# Altium PCB ESE516_shipwars_PCB.PcbDoc (part 1 of 2)
Units mil, origin at the board's own origin, x right, y up, seen from the top; angles counter-clockwise.
Board outline 2999 x 2670.2 mil, 4 copper layers (Top Layer, GroundPlane, PowerPlane, Bottom Layer), stack 58.4 mil thick; 119 components, 72 nets, 383 pads, 75 vias.
Unrouted connection lines stored in the file: 92.
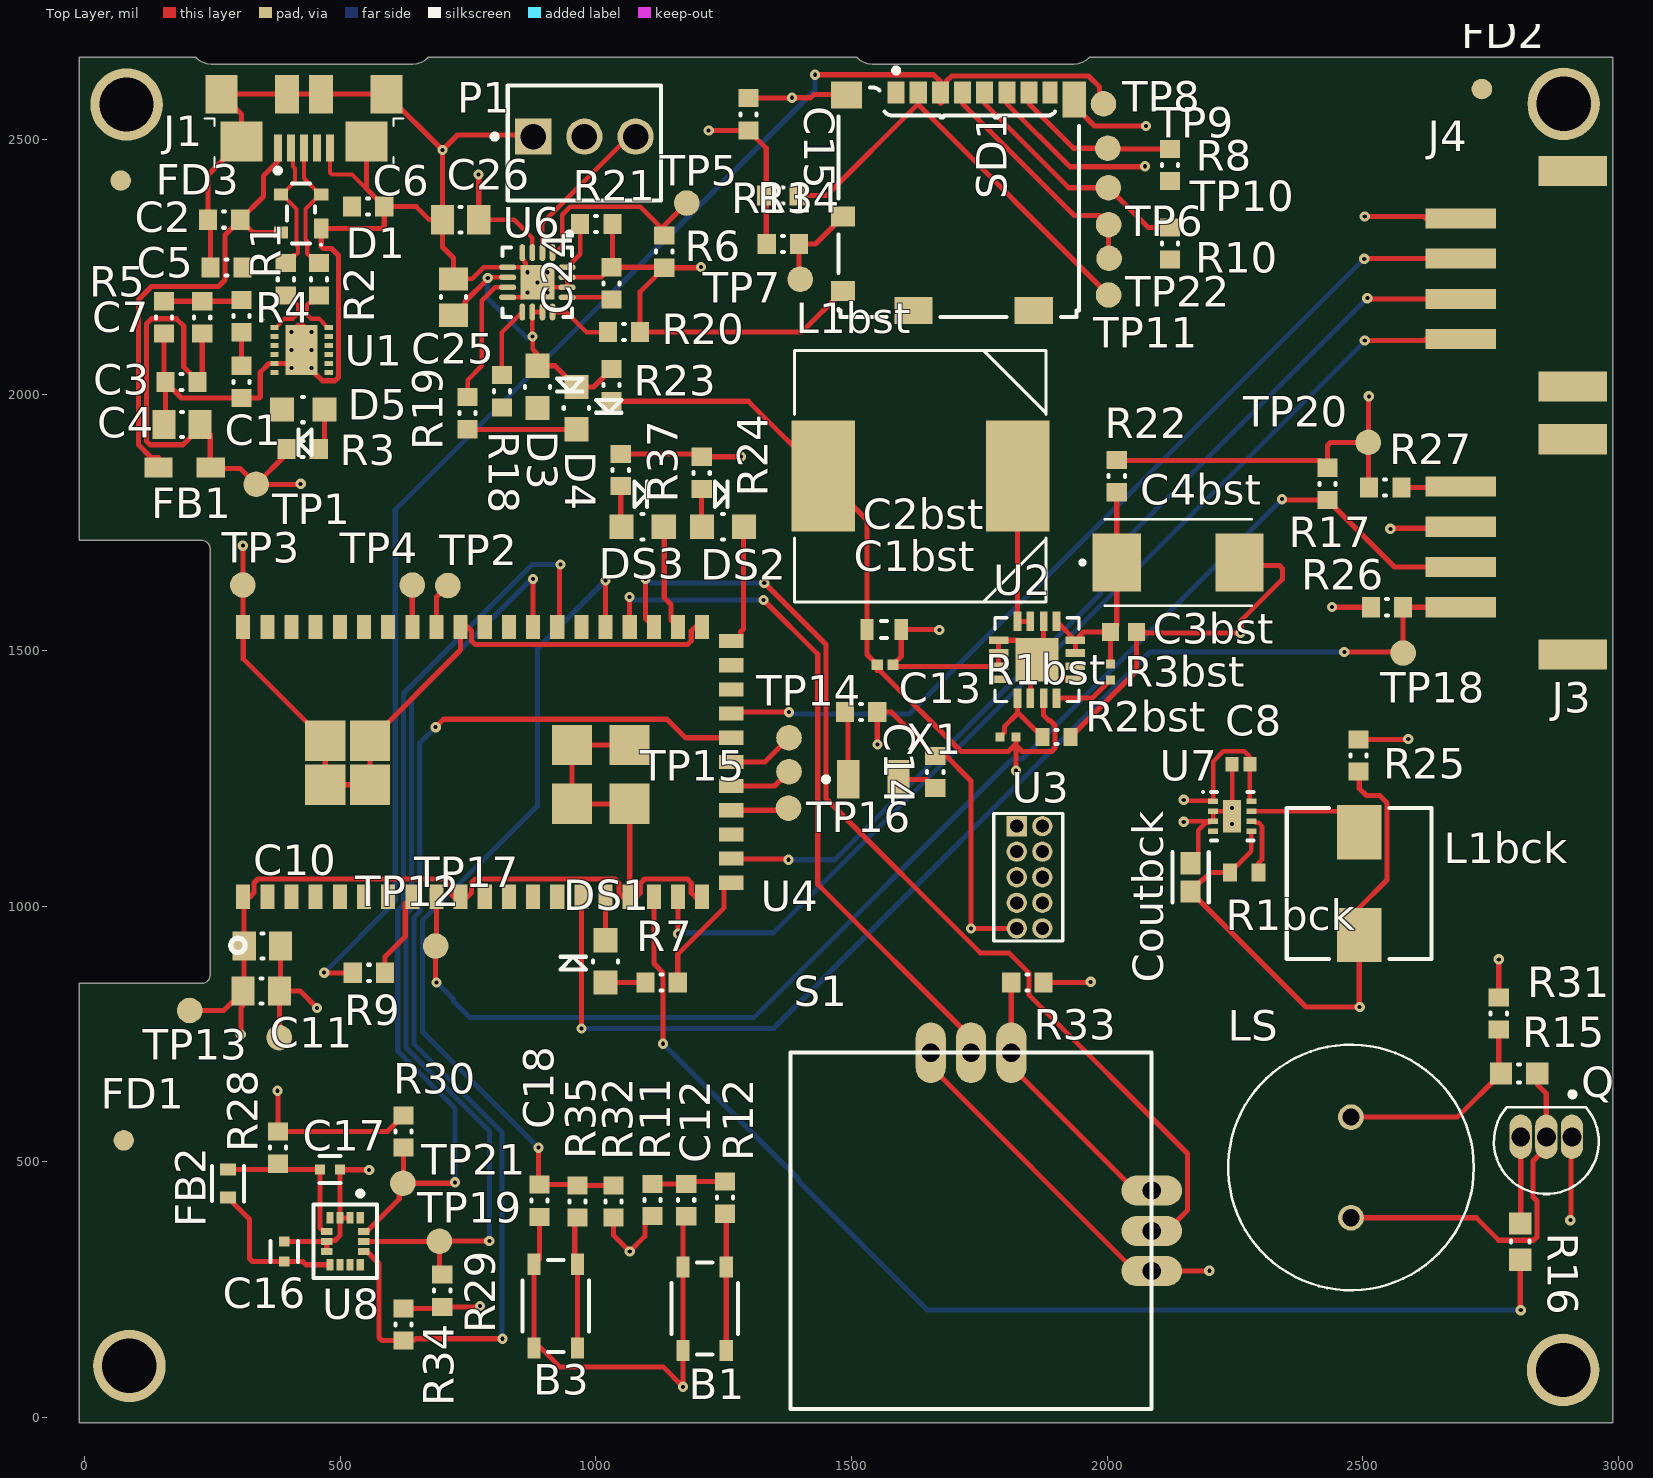
[diagram p0: Top Layer view]
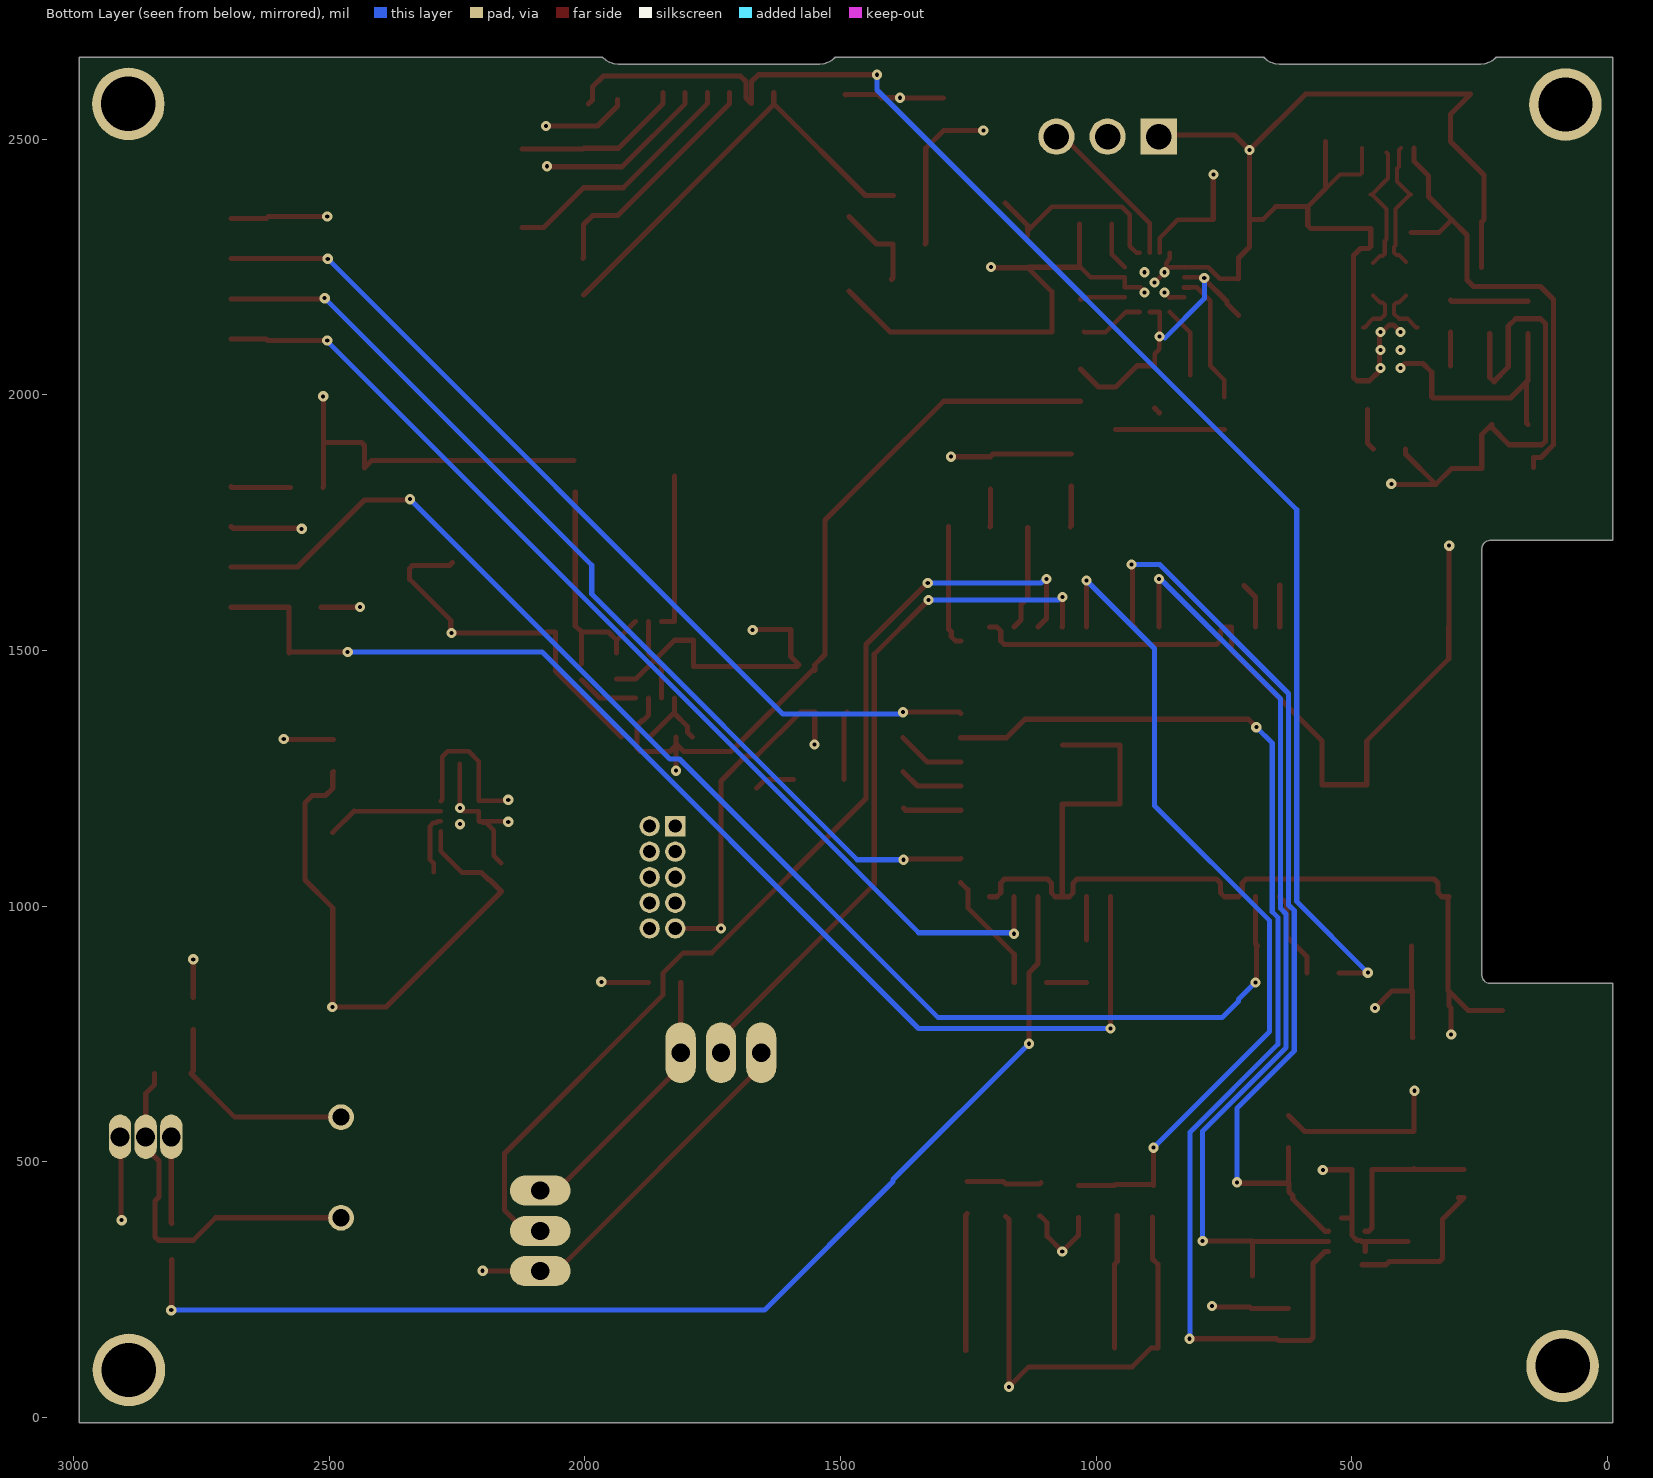
[diagram p1: Bottom Layer view, seen from below]

## Layer stack, top to bottom
Top Solder: solder mask 1, Solder Resist, Dk 3.5
Top Layer: signal copper 1.5
Dielectric1: prepreg 13, PP-006, Dk 4.1
GroundPlane: signal copper 0.7
Dielectric 2: core 28, Core-009, Dk 4.5
PowerPlane: signal copper 0.7
Dielectric 3: prepreg 13, PP-006, Dk 4.1
Bottom Layer: signal copper 1.5
Bottom Solder: solder mask 1, Solder Resist, Dk 3.5

## Board outline
-10,-10 -10,849.18 230.16,849.18 233.66,849.57 236.99,850.73 239.98,852.61 242.48,855.1 244.35,858.09 245.51,861.42 245.91,864.93 245.91,1699.57 245.51,1703.08 244.35,1706.41 242.48,1709.4 239.98,1711.89 236.99,1713.77 233.66,1714.93 230.16,1715.32 -10,1715.32 -10,2660.2 217.99,2660.16 224.34,2654.35 231.77,2650.01 239.95,2647.33 248.5,2646.42 642.2,2646.42 650.77,2647.32 658.95,2650.01 666.38,2654.37 672.72,2660.2 1510.67,2660.16 1517.02,2654.35 1524.45,2650.01 1532.62,2647.33 1541.18,2646.42 1934.88,2646.42 1943.45,2647.32 1951.63,2650.01 1959.06,2654.37 1965.39,2660.2 2989,2660.2 2989,-10

## Design rules (kind name [scope] priority, off if disabled: settings)
AcuteAngle [All] p1: minimum=6.00000000000000E+0001 checktracksonly=TRUE
AssemblyTestPointUsage [All] p1 off: allowmultiple=TRUE
AssemblyTestpoint [All] p1 off: testpointundercomponent=TRUE minsize=30 maxsize=100 preferedsize=60 minholesize=0 maxholesize=40 preferedholesize=32 testpointgrid=1 usegrid=FALSE gridtolerance=0.01 allowsidebottom=TRUE
BoardOutlineClearance "BoardOutlineClearance_Inner Layer" [OnLayer('GroundPlane')OR OnLayer('PowerPlane')] p1: gap=20 ignorepadtopadclearanceinfootprint=FALSE
BoardOutlineClearance BoardOutlineClearance_OuterLayers [All] p2: gap=10 ignorepadtopadclearanceinfootprint=FALSE except(20: SMDPad-OutlineEdge SMDPad-CavityEdge SMDPad-CutoutEdge THPad-OutlineEdge THPad-CavityEdge THPad-CutoutEdge)
Clearance [All] p1: gap=6 ignorepadtopadclearanceinfootprint=FALSE except(10: SMDPad-THPad)
DiffPairsRouting [All] p1: maxlimit=10 minlimit=6 mostfreqgap=10 toplayer_minwidth=6 toplayer_maxwidth=25 toplayer_prefwidth=15 midlayer1_minwidth=6 midlayer1_maxwidth=25 midlayer1_prefwidth=15 midlayer2_minwidth=6 midlayer2_maxwidth=25 midlayer2_prefwidth=15 bottomlayer_minwidth=6 bottomlayer_maxwidth=25 bottomlayer_prefwidth=15 maxuncoupledlength=500
FabricationTestPointUsage [All] p1 off: valid=0 allowmultiple=TRUE
FabricationTestpoint [All] p1 off: side=2 testpointundercomponent=TRUE minsize=30 maxsize=100 preferedsize=60 minholesize=0 maxholesize=40 preferedholesize=32 testpointgrid=1 allowsidebottom=TRUE usegrid=FALSE gridtolerance=0.01
HoleSize [All] p1: absolutevalues=TRUE maxlimit=150 minlimit=8 maxpercent=80.000 minpercent=20.000
MinimumAnnularRing [All] p1: minimumring=6
MinimumSolderMaskSliver [All] p1: minsoldermaskwidth=2
PlaneClearance [All] p1: clearance=10
PlaneConnect [All] p1: pad.planeconnectstyle=Relief pad.reliefexpansion=20 pad.reliefentries=4 pad.reliefconductorwidth=10 pad.reliefairgap=10 via.planeconnectstyle=Direct via.reliefexpansion=20 via.reliefentries=4 via.reliefconductorwidth=10 via.reliefairgap=10
PolygonConnect [All] p1: thpad.connectstyle=Relief thpad.reliefconductorwidth=10 thpad.reliefentries=4 thpad.polygonreliefangle="90 Angle" thpad.airgapwidth=8 smdpad.connectstyle=Relief smdpad.reliefconductorwidth=10 smdpad.reliefentries=4 smdpad.polygonreliefangle="90 Angle" smdpad.airgapwidth=8 via.connectstyle=Direct via.reliefconductorwidth=10 via.reliefentries=4 via.polygonreliefangle="90 Angle" via.airgapwidth=8
RoutingVias [All] p1: holewidth=8 width=20 viastyle="Through Hole" minholewidth=8 minwidth=20 maxholewidth=30 maxwidth=50
SMDNeckDown [All] p1: percent=90.000
SMDToCorner [All] p1: distance=0
SMDToPlane [All] p1: distance=0
SilkToSilkClearance [All] p1: silktosilkclearance=0
SilkToSolderMaskClearance [IsPad] p1: minsilkscreentomaskgap=2 clearancetoexposedcopper=TRUE
SolderMaskExpansion [All] p1: expansion=2 istentingtop=FALSE
UnRoutedNet [All] p1: checkbadconnections=TRUE
ViasUnderSMD [All] p1: allowed=FALSE
Width [All] p1: maxlimit=1000 minlimit=6 preferedwidth=10
18 further rules are at their usual default settings.

## Classes and differential pairs
component class U_Joystick: S1
component class U_Accelero: C16 C17 FB2 U8
component class U_5v_BOOST: C1bst C2bst C3bst C4bst L1bst R1bst R2bst R3bst U2
component class U_3.3v_BUCK: C8 Coutbck L1bck R1bck U7
component class Q_Buzzer: LS Q R15 R16
component class U_Memory: C15 R13 R14 SD1 TP6 TP7 TP8 TP9 TP10 TP11
component class U_MCU: B1 C10 C11 C12 C13 C14 R11 R12 TP12 TP13 TP14 TP15 TP16 U3 U4 X1
component class U_LiPo_Charger: C24 C25 C26 D3 D4 R18 R19 R20 R21 U6
component class U_FTDI: C1 C2 C3 C4 C5 C6 C7 D1 D5 FB1 R1 R2 R3 R4 R5 U1
component class MAIN: B3 C18 DS1 DS2 DS3 FD1 FD2 FD3 J1 J3 J4 P1 R6 R7 R8 R9 R10 R17 R22 R23 R24 R25 R26 R27 R28 R29 R30 R31 R32 R33 R34 R35 R37 TP1 TP2 TP3 TP4 TP5 TP17 TP18 TP19 TP20 TP21 TP22
differential pair USB_FTDI_DATA: +USB_FTDI_DATA_P -USB_FTDI_DATA_N
differential pair USB_DATA: +USB_DATA_P -USB_DATA_N

## Components (designator, comment, footprint, x,y, rotation, side; value= is the part's Value field where it differs from the comment)
B1 "PTS810 SJK 250 SMTR LFS" "PTS810 SJK 250 SMTR LFS" 1213,213 r270 top
B3 "PTS810 SJK 250 SMTR LFS" "PTS810 SJK 250 SMTR LFS" 922,218 r270 top
C1 "100nF 16V" CAPC0603(1608)100_N 307.54,2025.28 r90 top value=100nF
C1bst "22uF 10V" CAPC1608X100X20ML10 1564,1541 r180 top
C2 "10nF 16V" CAPC0603(1608)100_N 273.5,2342.5 r0 top value=10nF
C2bst "100nF 10V" CAPC1005X55X25LL05T10 1566,1472 r180 top
C3 "100nF 16V" CAPC0603(1608)100_N 190,2025.28 r0 top value=100nF
C3bst "1uF 10V" CAPC1608X90X35LL15T15 2032,1536 r180 top
C4 "4.7uF 16V" CAPC0805(2012)145_N 191,1942 r0 top value=4.7uF
C4bst "470uF 6.3V" 6TPB470M 2139,1672 r0 top
C5 "47pF 16V" CAPC0603(1608)100_N 278,2249 r0 top value=47pF
C6 "47pF 16V" CAPC0603(1608)100_N 555,2368 r180 top value=47pF
C7 "100nF 16V" CAPC0603(1608)100_N 155.57,2151.61 r90 top value=100nF
C8 "10uF 6.3V" GRJ155R60J106ME11D 2262,1278 r0 top
C10 "10uF 16V" CAPC0805(2012)145_N 348,922 r0 top value=10uF
C11 "CAP 10uF 16V 0805(2012)" CAPC0805(2012)145_N 346,834 r0 top value=10uF
C12 "1uF 16V" CAPC0603(1608)100_N 1177,425 r90 top value=1uF
C13 "18pF 16V" CAPC0603(1608)100_N 1519.15,1379.44 r180 top value=18pF
C14 "18pF 16V" CAPC0603(1608)100_N 1664,1262.5 r270 top value=18pF
C15 "CAP 100nF 16V 0603(1608)" CAPC0603(1608)100_N 1298.5,2548.63 r270 top value=100nF
C16 "0.1uF 16V" FP-CC0402-MFG 391,324.85 r90 top value="100 nF"
C17 "0.1uF 16V" FP-CC0402-MFG 480.55,485 r0 top value="100 nF"
C18 "1uF 16V" CAPC0603(1608)100_N 890,424 r90 top value=1uF
C24 "1uF 16V" CAPC0603(1608)100_N 1031,2218.03 r270 top value=1uF
C25 "4.7uF 16V" CAPC0805(2012)145_N 722,2191 r270 top value=4.7uF
C26 "4.7uF 16V" CAPC0805(2012)145_N 735.85,2342.5 r180 top value=4.7uF
Coutbck "22uF 6.3V" FP-GRM188-0_2-IPC_B 2163.34,1056.14 r270 top
D1 "PRTR5V0U2X,215" NXP-SOT143B-4_V 423.88,2354.53 r180 top
D3 "LTST-C170CKT" LTST-C170CKT_V 886,2015.43 r270 top
D4 "LTST-C170GKT" LTST-C170GKT_V 962.13,1973.91 r270 top
D5 "LTST-C170CKT" LTST-C170CKT_V 428,1971 r180 top
DS1 "LTST-C170GKT" LTST-C170GKT_V 1019.31,892.16 r90 top
DS2 "LTST-C170GKT" LTST-C170GKT_V 1249,1742 r0 top
DS3 "LTST-C170CKT" LTST-C170CKT_V 1091.66,1742 r0 top
FB1 "BLM21PG221SN1D" MURA-BLM21-B20-CHIP-2_V2 196.18,1858 r0 top
FB2 "30Ohm 100MHz" FP-MPZ1608-MFG 281,457.44 r90 top
FD1 "40x100mm" Fiducial_FT 77,542 r0 top
FD2 "40x100mm" Fiducial_FT 2733,2598 r0 top
FD3 "40x100mm" Fiducial_FT 71,2419 r0 top
J1 "ZX62R-B-5P" HIRO-ZX62R-B-5P_V 429.58,2535.34 r180 top
J3 "S4B-PH-SM4-TB(LF)(SN)" S4B-PH-SM4-TB(LF)(SN) 2692,1584.52 r270 top
J4 "S4B-PH-SM4-TB(LF)(SN)" S4B-PH-SM4-TB(LF)(SN) 2692,2108.83 r270 top
L1bck "1uH" WE-HCI-7040 2493.14,1044 r270 top
L1bst "2.2uH" DR127-2R2-R 1635,1841 r180 top
LS "PS1240P02BT" PS1240P02BT 2477,489 r90 top
P1 "640456-3" TECO-640456-3 978,2505 r180 top
Q "50V 150mA" 2SC1815 2859,521.83 r180 top
R1 "27R 1%" RESC0603(1608)_N 394,2226 r270 top value="27.00 Ohm"
R1bck "178kOhm" RESC1608X55X25NL10T15 2268.28,1066 r0 top
R1bst "2.15MOhm" RESC1005X40X25LL05T05 1806,1331 r0 top
R2 "27R 1%" RESC0603(1608)_N 459,2226 r270 top value="27.00 Ohm"
R2bst "390kOhm" RESC0603(1608)_L 1901,1331 r180 top value="390000.00 Ohm"
R3 "1K 1%" RESC0603(1608)_N 427,1894 r180 top value="1000.00 Ohm"
R3bst "2.15MOhm" RESC1005X40X25LL05T05 2006.41,1458.25 r90 top
R4 "Jumper" RESC0603(1608)_N 307.54,2153.79 r90 top value="0.00 Ohm"
R5 "1K 1%" RESC0603(1608)_N 230.5,2151.61 r90 top value="1000.00 Ohm"
R6 "1K 1%" RESC0603(1608)_N 1134,2280 r270 top value="1000.00 Ohm"
R7 "1K 1%" RESC0603(1608)_N 1129,851 r180 top value="1000.00 Ohm"
R8 "27R 1%" RESC0603(1608)_N 2123,2449.5 r90 top value="27.00 Ohm"
R9 "27R 1%" RESC0603(1608)_N 556.5,869.68 r180 top value="27.00 Ohm"
R10 "27R 1%" RESC0603(1608)_N 2123,2296 r90 top value="27.00 Ohm"
R11 "10K 1%" RESC0603(1608)_N 1110.8,425.25 r270 top value="10000.00 Ohm"
R12 "100R 1%" RESC0603(1608)_N 1253,430 r90 top value="100.00 Ohm"
R13 "10K 1% 0603(1608)" RESC0603(1608)_N 1365,2390 r180 top value="10000.00 Ohm"
R14 "10K 1% 0603(1608)" RESC0603(1608)_N 1366,2295 r180 top value="10000.00 Ohm"
R15 "1KOhm 1%" RESC0603(1608)_M 2806,673 r180 top value="1000.00 Ohm"
R16 "1KOhm 1%" RESC0603(1608)_M 2808,344 r90 top value="1000.00 Ohm"
R17 "10KΩ 1%" RESC0603(1608)_N 2431,1826 r90 top value="10000.00 Ohm"
R18 "1K 1%" RESC0603(1608)_N 816.43,2007 r270 top value="1000.00 Ohm"
R19 "1K 1%" RESC0603(1608)_N 749.63,1964.06 r270 top value="1000.00 Ohm"
R20 "1K13 1%" RESC0603(1608)_N 1055.5,2123.14 r180 top value="1130.00 Ohm"
R21 "1K13 1%" RESC0603(1608)_N 1001,2334 r180 top value="1130.00 Ohm"
R22 "Jumper" RESC0603(1608)_N 2018.92,1841 r90 top value="0.00 Ohm"
R23 "Jumper" RESC0603(1608)_N 1031,2019 r270 top value="0.00 Ohm"
R24 "1K 1%" RESC0603(1608)_N 1207.29,1847.5 r270 top value="1000.00 Ohm"
R25 "Jumper" RESC0603(1608)_N 2492,1294.5 r90 top value="0.00 Ohm"
R26 "10KΩ 1%" RESC0603(1608)_N 2547.45,1584.52 r180 top value="10000.00 Ohm"
R27 "Jumper" RESC0603(1608)_N 2544,1819 r180 top value="0.00 Ohm"
R28 "Jumper" RESC0603(1608)_N 379,527.73 r90 top value="0.00 Ohm"
R29 "10KΩ 1%" RESC0603(1608)_N 700,248 r270 top value="10000.00 Ohm"
R30 "10KΩ 1%" RESC0603(1608)_N 624,559.22 r90 top value="10000.00 Ohm"
R31 "Jumper" RESC0603(1608)_N 2766,790 r90 top value="0.00 Ohm"
R32 "10K 1%" RESC0603(1608)_N 1035,422.38 r270 top value="10000.00 Ohm"
R33 "Jumper" RESC0603(1608)_N 1844.24,851 r0 top value="0.00 Ohm"
R34 "10KΩ 1%" RESC0603(1608)_N 624,181.94 r270 top value="10000.00 Ohm"
R35 "100R 1%" RESC0603(1608)_N 964.32,422.38 r90 top value="100.00 Ohm"
R37 "1K 1%" RESC0603(1608)_N 1049,1853 r270 top value="1000.00 Ohm"
S1 "ADA_2765" ADA_2765 1734,365 r90 top
SD1 "104031-0811" MOLX-104031-0811_V 1710,2378 r180 top locked
TP1 "0.1\" Pad" PCBComponent 336,1825 r90 top
TP2 "0.1\" Pad" PCBComponent 711,1627 r90 top
TP3 "0.1\" Pad" PCBComponent 310,1628 r90 top
TP4 "0.1\" Pad" PCBComponent 641.36,1628 r90 top
TP5 "0.1\" Pad" PCBComponent 1178,2375 r90 top
TP6 "0.1\" Pad" PCBComponent 2003,2332.87 r90 top
TP7 "0.1\" Pad" PCBComponent 1400,2226 r90 top
TP8 "0.1\" Pad" PCBComponent 1993,2569 r90 top
TP9 "0.1\" Pad" PCBComponent 2001.59,2482.13 r90 top
TP10 "0.1\" Pad" PCBComponent 2002.59,2405 r90 top
TP11 "0.1\" Pad" PCBComponent 2003,2195.3 r90 top
TP12 "0.1\" Pad" PCBComponent 381,743 r90 top
TP13 "0.1\" Pad" PCBComponent 206,796 r90 top
TP14 "0.1\" Pad" PCBComponent 1378,1329.34 r90 top
TP15 "0.1\" Pad" PCBComponent 1378,1263.01 r90 top
TP16 "0.1\" Pad" PCBComponent 1377,1191.75 r90 top
TP17 "0.1\" Pad" PCBComponent 687,922 r90 top
TP18 "0.1\" Pad" PCBComponent 2578.94,1495 r90 top
TP19 "0.1\" Pad" PCBComponent 694.34,344.88 r180 top
TP20 "0.1\" Pad" PCBComponent 2511,1907 r90 top
TP21 "0.1\" Pad" PCBComponent 623,458.22 r180 top
TP22 "0.1\" Pad" PCBComponent 2004,2266.87 r90 top
U1 "FT234XD-R" DFN-12_V 424.85,2087.71 r0 top
U2 "TPS61032RSAR" TPS61032RSAR 1863,1482 r270 top
U3 "20021111-00010T4LF" 20021111-00010T4LF 1873.44,1056.54 r270 top
U4 "SAMW25H18-MR510PB" SAMW25H18-MR510PB 787.83,1282.25 r180 top locked
U6 "BQ24075RGTRG4" RGT16-1700X1700TP 886,2220 r270 top
U7 "TPS62082DSGR" DSG8-1600X900TP 2244.72,1176 r0 top
U8 "LSM6DSOTR" FP-LGA-14L-DM00249496-MFG 510.07,344.54 r270 top
X1 "ABS07-32.768KHz-T" ABRA-ABS07-2_V 1543,1248 r0 top

## Footprints (in the part's own frame and the unit in brackets; to place one, negate y for a bottom-side part, rotate by r counter-clockwise, add the part's x,y. Pads: shape width x height; smd on the part's side, far side on the other; paste and mask are expansions set on the pad)
2SC1815 [mm]
  oval 1.1x2.2 hole 0.94: 1(-1.27,-0.69) 2(0,-0.69) 3(1.27,-0.69)
  silkscreen extent -2.6,-2.9 2.6,2.15, body extent -2.41,-2.03 2.41,1.65, height 5.35
6TPB470M [mm]
  rect 2.4x2.9 smd: 1(-3.05,0) 2(3.05,0)
  silkscreen extent -4.85,-2.15 3.65,2.15, body extent -3.8,-2.25 3.8,2.25, height 3.99
20021111-00010T4LF [mil] "CONN HEADER 10POS UNSHD VERT T/H"
  rect 39.6x39.6 hole 25.6: 1(-100,-50)
  round 39.6 hole 25.6: 2(-100,0) 3(-50,-50) 4(-50,0) 5(0,-50) 6(0,0) 7(50,-50) 8(50,0) 9(100,-50) 10(100,0)
  silkscreen extent -125,-95 125,40, body extent -125,-92 125,42, height 217
ABRA-ABS07-2_V [mm] "Hand Drawn, 2-Leads, Body 3.2x1.5mm, Pitch 2.5mm"
  rect 1.1x1.9 smd: 1(-1.25,0) 2(1.25,0)
  silkscreen extent -2.47,-0.12 -2.22,0.12, body extent -1.6,-0.75 1.6,0.75, height 0.9
ADA_2765 [mm]
  oval 3x1.5 hole 0.9 mask+0.051: X1(8.85,0) X2(8.85,-2) X3(8.85,2)
  oval 1.5x3 hole 0.9 mask+0.051: Y1(0,-8.975) Y2(2,-8.975) Y3(-2,-8.975)
  silkscreen extent -8.85,-8.98 8.85,8.98, body extent -8.88,-9 8.91,8.96, height 5.5
CAPC0603(1608)100_N [mm] "Chip Capacitor, Body 1.6x0.8mm, Height 1.0mm, IPC Medium Density"
  rect 0.9x1 smd: 1(-0.8,0) 2(0.8,0)
  silkscreen extent -0.05,-0.4 0.05,0.4, body extent -0.87,-0.48 0.88,0.47, height 1
CAPC0805(2012)145_N [mm] "Chip Capacitor, Body 2.0x1.2mm, Height 1.45mm, IPC Medium Density"
  rect 1.15x1.45 smd: 1(-0.9,0) 2(0.9,0)
  silkscreen extent -0.05,-0.62 0.05,0.63, body extent -1.1,-0.72 1.1,0.73, height 1.45
CAPC1005X55X25LL05T10 [mm] "Chip Capacitor, 2-Leads, Body 1.05x0.55mm, IPC High Density"
  rect 0.56x0.52 smd: 1(-0.39,0) 2(0.39,0)
  body extent -0.53,-0.28 0.53,0.28, height 0.55
CAPC1608X90X35LL15T15 [mm] "Chip Capacitor, 2-Leads, Body 1.60x0.81mm, IPC High Density"
  rect 0.85x0.9 smd: 1(-0.65,0) 2(0.65,0)
  body extent -0.88,-0.48 0.87,0.48, height 0.9
CAPC1608X100X20ML10 [mm] "Chip Capacitor, 2-Leads, Body 1.70x0.90mm, IPC Low Density"
  rect 0.65x1.05 smd: 1(-0.85,0) 2(0.85,0)
  silkscreen extent -0.15,-0.43 0.15,0.43, body extent -0.85,-0.45 0.85,0.45, height 1
DFN-12_V [mm] "SON, 12-Leads, Body 3x3mm, Pitch 0.45mm, Thermal Pad 2.5x1.6mm"
  rect 0.4x0.25 smd: 1(-1.35,1.125) 2(-1.35,0.675) 3(-1.35,0.225) 4(-1.35,-0.225) 5(-1.35,-0.675) 6(-1.35,-1.125) 7(1.35,-1.125) 8(1.35,-0.675) 9(1.35,-0.225) 10(1.35,0.225) 11(1.35,0.675) 12(1.35,1.125)
  rect 1.6x2.5 smd mask+0.102: 13(0,0)
  silkscreen extent -2,1.45 -1.9,1.55, body extent -1.5,-1.5 1.5,1.5, height 0.9
DR127-2R2-R [mil]
  rect 124x217 smd: 1(-190,0) 2(190,0)
  silkscreen extent -246,-246 246,246, body extent -245,-245 245,245, height 157
DSG8-1600X900TP [mm] "SON, 8-Leads, Body 2x2mm, Pitch 0.5mm, Thermal Pad 1.6x0.9mm, TI Recommended"
  rect 0.5x0.28 smd paste-0.14 mask+0.07: 1(-0.95,0.75) 2(-0.95,0.25) 3(-0.95,-0.25) 4(-0.95,-0.75) 5(0.95,-0.75) 6(0.95,-0.25) 7(0.95,0.25) 8(0.95,0.75)
  rect 0.9x1.6 smd paste-0.45 mask+0.07: 9(0,0)
  silkscreen extent -1.5,-1.2 1.05,1.25, body extent -1.05,-1.05 1.05,1.05, height 0.8
Fiducial_FT [mil]
  round 40 smd paste-30 mask+30: ""(0,0)
FP-CC0402-MFG [mm]
  rect 0.5x0.5 smd paste+0 mask+0: 1(-0.5,0) 2(0.5,0)
  silkscreen extent -0.53,-0.68 0.53,0.67, body extent -0.87,-0.48 0.87,0.48, height 0.25
FP-GRM188-0_2-IPC_B [mil]
  rect 43.51x39.61 smd paste+0 mask+0: 1(-27.58,0) 2(27.58,0)
  silkscreen extent -49,-36 49,36, body extent -59,-30 59,30, height 10
FP-LGA-14L-DM00249496-MFG [mm]
  rect 0.575x0.35 smd paste+0 mask+0: 1(-1.162,0.75) 2(-1.162,0.25) 3(-1.162,-0.25) 4(-1.162,-0.75) 8(1.162,-0.75) 9(1.162,-0.25) 10(1.162,0.25) 11(1.162,0.75)
  rect 0.35x0.575 smd paste+0 mask+0: 5(-0.5,-0.913) 6(0,-0.913) 7(0.5,-0.913) 12(0.5,0.913) 13(0,0.913) 14(-0.5,0.913)
  silkscreen extent -2.5,-1.58 1.83,1.58, body extent -2.05,-1.8 2.05,1.8, height 0.25
FP-MPZ1608-MFG [mm]
  rect 0.6x0.8 smd paste+0 mask+0: 1(-0.7,0) 2(0.7,0)
  silkscreen extent -0.88,-0.8 0.87,0.8, body extent -1.1,-0.58 1.1,0.58, height 0.25
GRJ155R60J106ME11D [mm]
  rect 0.64x0.72 smd: 1(-0.439,0) 2(0.439,0)
  body extent -0.5,-0.25 0.5,0.25, height 0.7
HIRO-ZX62R-B-5P_V [mm] "USB Micro-B R/A Connector"
  rect 0.4x1.35 smd: 1(1.3,1.338) 2(0.65,1.338) 3(0,1.338) 4(-0.65,1.338) 5(-1.3,1.338)
  rect 2.1x2 smd: 6(-3.1,1.012) 11(3.1,1.012)
  rect 1.6x1.9 smd: 7(-4.1,-1.338) 10(4.1,-1.338)
  rect 1.2x1.9 smd: 8(-0.85,-1.338) 9(0.85,-1.338)
  silkscreen extent -4.95,-0.13 4.95,2.58, body extent -4.4,-3.95 4.4,1.78, height 2.71
LTST-C170CKT_V [mm] "SMD, 2-Leads, Body 2x1.25mm"
  rect 1.2x1.2 smd: 1(-1.05,0) 2(1.05,0)
  silkscreen extent -0.41,-0.63 0.23,2.25, body extent -1,-0.63 1,0.63, height 1.1
LTST-C170GKT_V [mm] "SMD, 2-Leads, Body 2x1.25mm"
  rect 1.2x1.2 smd: 1(-1.05,0) 2(1.05,0)
  silkscreen extent -0.41,-0.63 0.23,2.25, body extent -1,-0.63 1,0.63, height 1.1
MOLX-104031-0811_V [mm] "Micro SD, 8-Leads, Body 11.95x11.4mm, Pitch 1.1mm"
  rect 0.85x1.1 smd: 1(3.113,-5.412) 2(2.013,-5.412) 3(0.913,-5.412) 4(-0.188,-5.412) 5(-1.288,-5.412) 6(-2.387,-5.412) 7(-3.487,-5.412)
  rect 0.75x1.1 smd: 8(-4.537,-5.412)
  rect 1.2x1 smd: 9(5.748,0.738) 10(5.748,4.438)
  rect 1.55x1.35 smd: 11(5.573,-5.287)
  rect 1.17x1.8 smd: 12(-5.747,-5.062)
  rect 1.9x1.35 smd: 13(-3.722,5.413) 14(2.248,5.413)
  silkscreen extent -5.97,-6.64 5.98,5.74, body extent -5.97,-5.66 5.98,5.74, height 1.45
MURA-BLM21-B20-CHIP-2_V2 [mm] "Chip Ferrite Bead, 2-Leads, Body 2x1.25mm, Height 1.05mm, 35/70um Land Pad Thickness, 2A Rated Current"
  rect 1.4x1 smd: 1(-1.3,0) 2(1.3,0)
  body extent -1,-0.63 1,0.63, height 1.05
NXP-SOT143B-4_V [mm] "SOT143, 4-Leads, Body 3x1.4mm"
  rect 0.7x1 smd: 1(-1,0.75)
  rect 0.7x0.6 smd: 2(-1,-0.95) 3(1,-0.95) 4(1,0.95)
  silkscreen extent -1.05,-1.5 0.7,1.6, body extent -0.7,-1.5 0.7,1.5, height 1.1
PCBComponent [mil]
  round 50 smd mask+0: 1(0,0)
  body extent -25,-25 25,25, height 0
PS1240P02BT [mm] "Buzzer"
  round 1.28 hole 0.85: 1(-2.5,0) 2(2.5,0)
  silkscreen extent -6.1,-6.1 6.1,6.1, body extent -6.1,-6.1 6.1,6.1, height 6.01
"PTS810 SJK 250 SMTR LFS" [mm] "SWITCH TACTILE SPST-NO 0.05A 16V"
  rect 1.05x0.65 smd: 1(-2.075,1.075) 2(2.075,1.075) 3(-2.075,-1.075) 4(2.075,-1.075)
  silkscreen extent -2.29,-1.65 2.29,1.65, body extent -2.3,-1.6 2.3,1.6, height 2.5
RESC0603(1608)_L [mm] "Chip Resistor, Body 1.6x0.8mm, IPC High Density"
  rect 0.7x0.9 smd: 1(-0.7,0) 2(0.7,0)
  silkscreen extent -0.05,-0.35 0.05,0.35, body extent -0.85,-0.47 0.85,0.47, height 0.6
RESC0603(1608)_M [mm] "Chip Resistor, Body 1.6x0.8mm, IPC Low Density"
  rect 1.1x1.1 smd: 1(-0.9,0) 2(0.9,0)
  silkscreen extent -0.05,-0.45 0.05,0.45, body extent -0.85,-0.47 0.85,0.47, height 0.6
RESC0603(1608)_N [mm] "Chip Resistor, Body 1.6x0.8mm, IPC Medium Density"
  rect 0.9x1 smd: 1(-0.8,0) 2(0.8,0)
  silkscreen extent -0.05,-0.4 0.05,0.4, body extent -0.85,-0.47 0.85,0.47, height 0.6
RESC1005X40X25LL05T05 [mm] "Chip Resistor, 2-Leads, Body 1.00x0.50mm, IPC High Density"
  rect 0.45x0.45 smd: 1(-0.4,0) 2(0.4,0)
  body extent -0.53,-0.27 0.53,0.28, height 0.4
RESC1608X55X25NL10T15 [mm] "Chip Resistor, 2-Leads, Body 1.60x0.80mm, IPC Medium Density"
  rect 0.7x0.9 smd: 1(-0.7,0) 2(0.7,0)
  body extent -0.85,-0.45 0.85,0.45, height 0.55
RGT16-1700X1700TP [mm] "QFN, 16-Leads, Body 3x3mm, Pitch 0.5mm, Thermal Pad 1.7x1.7mm, TI Recommended"
  oval 0.85x0.28 smd paste-0.025 mask+0.07: 1(-1.475,0.75) 2(-1.475,0.25) 3(-1.475,-0.25) 4(-1.475,-0.75) 9(1.475,-0.75) 10(1.475,-0.25) 11(1.475,0.25) 12(1.475,0.75)
  oval 0.28x0.85 smd paste-0.025 mask+0.07: 5(-0.75,-1.475) 6(-0.25,-1.475) 7(0.25,-1.475) 8(0.75,-1.475) 13(0.75,1.475) 14(0.25,1.475) 15(-0.25,1.475) 16(-0.75,1.475)
  rect 1.7x1.7 smd paste-0.85 mask+0.07: 17(0,0)
  silkscreen extent -2.5,-1.73 1.73,1.73, body extent -1.57,-1.57 1.58,1.58, height 1
S4B-PH-SM4-TB(LF)(SN) [mm]
  rect 1x3.5 smd: 1(0,0) 2(-2,0) 3(-4,0) 4(-6,0)
  rect 1.5x3.4 smd: 5(-8.35,5.55) 5(2.35,5.55)
  body extent -8.9,-1.54 3,7.06, height 5.61
SAMW25H18-MR510PB [mm] "RF TXRX MODULE WIFI TRACE ANT"
  rect 2x2 smd: 0(-7.065,-0.839) 0(-7.065,2.085) 0(-4.21,-0.839) 0(-4.21,2.085)
  rect 2x2 smd mask+0.127: 0(5.828,-1.045) 0(5.828,1.137) 0(8.046,-1.045) 0(8.046,1.137)
  rect 0.7x1.2 smd: 1(12.121,6.7) 2(10.921,6.7) 3(9.721,6.7) 4(8.521,6.7) 5(7.321,6.7) 6(6.121,6.7) 7(4.921,6.7) 8(3.721,6.7) 9(2.521,6.7) 10(1.321,6.7) 11(0.121,6.7) 12(-1.079,6.7) 13(-2.279,6.7) 14(-3.479,6.7) 15(-4.679,6.7) 16(-5.879,6.7) 17(-7.079,6.7) 18(-8.279,6.7) 19(-9.479,6.7) 20(-10.679,6.7) 32(-10.679,-6.7) 33(-9.479,-6.7) 34(-8.279,-6.7) 35(-7.079,-6.7) 36(-5.879,-6.7) 37(-4.679,-6.7) 38(-3.479,-6.7) 39(-2.279,-6.7) 40(-1.079,-6.7) 41(0.121,-6.7) 42(1.321,-6.7) 43(2.521,-6.7) 44(3.721,-6.7) 45(4.921,-6.7) 46(6.121,-6.7) 47(7.321,-6.7) 48(8.521,-6.7) 49(9.721,-6.7) 50(10.921,-6.7) 51(12.121,-6.7)
  rect 1.2x0.7 smd: 21(-12.12,6.004) 22(-12.12,4.804) 23(-12.12,3.604) 24(-12.12,2.404) 25(-12.12,1.204) 26(-12.12,0.004) 27(-12.12,-1.196) 28(-12.12,-2.396) 29(-12.12,-3.596) 30(-12.12,-4.796) 31(-12.12,-5.996)
  silkscreen extent 12.02,8.76 12.74,9.48, body extent -12.89,-7.45 20.98,7.46, height 3.37
TECO-640456-3 [mm] "Through Hole, 3-Leads, Body 7.62x5.72mm, Pitch 2.54mm"
  rect 1.8x1.8 hole 1.27 paste+0: 1(2.54,0)
  round 1.8 hole 1.27 paste+0: 2(0,0) 3(-2.54,0)
  silkscreen extent -3.81,-2.54 4.59,3.18, body extent -3.81,-2.54 3.81,3.18, height 10.03
TPS61032RSAR [mil]
  rect 38x15 smd: 1(-75,38) 2(-75,13) 3(-75,-13) 4(-75,-38) 9(75,-38) 10(75,-13) 11(75,13) 12(75,38)
  rect 15x38 smd: 5(-38,-75) 6(-13,-75) 7(13,-75) 8(38,-75) 13(38,75) 14(13,75) 15(-13,75) 16(-38,75)
  rect 85x85 smd: 17(0,0)
  silkscreen extent -82,-82 82,82, body extent -79,-79 79,79, height 40
WE-HCI-7040 [mm] "SMD Inductor, 2-Leads, Body 7.0 x 6.9 mm"
  rect 2.7x2.2 smd: 1(-2.55,0) 2(2.55,0)
  silkscreen extent -3.75,-3.6 3.75,3.6, body extent -3.5,-3.45 3.5,3.45, height 4

## Part data
B1 B3: "SWITCH TACTILE SPST-NO 0.05A 16V Tactile Switch SPST-NO Top Actuated Surface Mount", Color=White, Current Rating="50 mA", Manufacturer="ITT /  C&K Components", Manufacturer Part Number=PTS810SJK250SMTRLFS, Operating Force="2.6 N", Operating Temperature Range="- 40 C to + 85 C", Supplier Part Number 1=CKN10503CT-ND, Voltage Rating DC="16 VDC", Actuator=Oval, Brand="C&K Components", ComponentLink1Description=https://datasheet.ciiva.com/18514/pts810-4mar13-18514061.pdf, ComponentLink1URL=https://datasheet.ciiva.com/18514/pts810-4mar13-18514061.pdf, ComponentLink2Description=https://datasheet.ciiva.com/18514/pts810-4mar13-18514062.pdf, ComponentLink2URL=https://datasheet.ciiva.com/18514/pts810-4mar13-18514062.pdf, ComponentLink3Description=https://datasheet.ciiva.com/18514/pts810-4mar13-18514063.pdf, ComponentLink3URL=https://datasheet.ciiva.com/18514/pts810-4mar13-18514063.pdf, Contact Form=SPST, Contact Plating=Silver, Factory Pack Quantity=2900, Mounting Direction=Straight, Mounting Style=SMD/SMT, Packaging=Reel, Part # Aliases=Y97LT25B5DBFP, Product Category="Tactile Switches", RoHS=Details, Series=PTS810, Stem Height="2.5 mm", Supplier 1=Digi-Key, Switch Function="OFF - (ON)", Termination Style="J Form Lead", Travel="0.15 mm"
C1 C3 C7 C15: library part CMP-1035-02584-1, "CAP 100nF 16V ±10% 0603 (1608 Metric) Thickness 1mm SMD", Case-EIA=0603, Case-Metric=1608, Rated Voltage="16 V", Tolerance=Â±10%, Max Thickness="1 mm", Technology=SMT
C1bst: library part CMP-2000-05441-1, "Chip Capacitor, 22 uF, +/- 20%, 10 V, -55 to 85 degC, 0603 (1608 Metric), RoHS, Tape and Reel", Capacitance=22µF, Manufacturer=TDK, Operating Temperature=-55degC~85degC, Package / Case=0603(1608Metric), Package Description="2-Pin Surface Mount Device, Body 1.6 x 0.8 mm", Package Reference=603, PCN Part Number=MLCCPartNumberChange30/Nov/2012, Ratings=-, Standard Package=1, Temperature Coefficient=X5R, Tolerance=±20%, Voltage - Rated=10V, Applications=GeneralPurpose, Category=Capacitors, Datasheet URL=http://download.siliconexpert.com/pdfs/2015/4/21/15/54/45/779/tdk_/manual/37024850441143360mlcc_commercial_general_en.pdf, Datasheet Version=Mar-15, Design Resources=20WNon-IsolatedBuckLEDDriverUsingPLLNK460KG, Family=CeramicCapacitors, Features=-, Height - Seated (Max)=-, Kits=445-9014-KIT-ND-KITMLCC100PF-22UF060310-50V, Lead Spacing=-, Lead Style=-, Manufacturer URL=http://www.tdk.com/, Mounting Type=SurfaceMount,MLCC, Online Catalog=CSeries,GeneralPurpose, Other Names=445-9077-1, Packaging=CutTape(CT), Product Training Modules=CSeriesGeneralApplicationsSEAT,CCV,andTVCLDesignToolsGuidetoReplacinganElectrolyticCapacitorwithanMLCC, RoHS Information=RoHSCertificate-MLCC, Series=C
C2: library part CMP-1035-02311-1, "CAP 10nF 16V ±10% 0603 (1608 Metric) Thickness 1mm SMD", Case-EIA=0603, Case-Metric=1608, Rated Voltage="16 V", Tolerance=Â±10%, Max Thickness="1 mm", Technology=SMT
C2bst: library part CMP-2000-06331-1, "Chip Capacitor, 0.1 uF, +/- 10%, 10 V, -55 to 125 degC, 0402 (1005 Metric), RoHS, Tape and Reel GRM155R71A104KA01D", Capacitance=100000pF, Case Size/Dimension=0402, Dielectric=X7R, Manufacturer=Murata, Package Description="2-Pin Surface Mount Device, Body 1 x 0.5 mm", Rated Voltage=10V, Tolerance (%)=±10%, Datasheet URL=http://search.murata.co.jp/Ceramy/image/img/A01X/G101/ENG/GRM155R71A104KA01-01.pdf, Datasheet Version=02/2016, Manufacturer URL=http://www.murata.com/, Mounting Technology=SurfaceMount, Package Reference=0402
C3bst: library part CMP-2006-02257-1, "0603(1608) C0603C105K8PACTU", Manufacturer=Kemet, Part Number=C0603C105K8PACTU
C4 C25 C26: library part CMP-1036-04893-1, "CAP 4.7uF 16V -20% to +80% 0805 (2012 Metric) Thickness 1.45mm SMD", Case-EIA=0805, Case-Metric=2012, Rated Voltage="16 V", Tolerance="-20% to +80%", Max Thickness="1.45 mm", Technology=SMT
C4bst: library part 6TPB470M, "Cap Tant Solid 470uF 6.3V D4 CASE 20% (7.3 X 4.3 X 3.8mm) 2917(7343) SMD 7343 0.035 Ohm 105 C Embossed T/R 6TPB470M", Capacitance=470uF, Case Code (Imperial)=2917, Case Code (Metric)=7343, ESR (Equivalent Series Resistance)=35mR, Leakage Current=296.1uA, Manufacturer=Panasonic, Max Operating Temperature=105°C, Min Operating Temperature=-55°C, Package=None, Package Quantity=2000, Ripple Current=3A, Supplier Part Number 1=P16619CT-ND, Tolerance=20%, Voltage=6.3V, Availability=Unavailable, Case/Package=2917, Category="Tantalum Capacitors", ComponentLink1Description=https://datasheet.ciiva.com/48675/aaa8000ce6-48675082.pdf?src-supplier=Avnet, ComponentLink1URL=https://datasheet.ciiva.com/48675/aaa8000ce6-48675082.pdf?src-supplier=Avnet, ComponentLink2Description=https://datasheet.ciiva.com/26840/getdatasheetpartid-747821-26840892.pdf?src-supplier=Verical, ComponentLink2URL=https://datasheet.ciiva.com/26840/getdatasheetpartid-747821-26840892.pdf?src-supplier=Verical, ComponentLink3Description=https://datasheet.ciiva.com/22745/1734361-22745321.pdf?src-supplier=Element14, ComponentLink3URL=https://datasheet.ciiva.com/22745/1734361-22745321.pdf?src-supplier=Element14, Depth=4.3mm, Dissipation Factor=15%, Height=3.8mm, Height - Seated (Max)=0.157inch, Lead Free="Lead Free", Length=7.3mm, Manufacturer Part Number=6TPB470M, Material=Polymer, Mount="Surface Mount", MP=6TPB470M, Number of Pins=4, Packaging="Tape and Reel", Polarity=Polar, Price=None, Pricing 1="1=2.80000, 10=2.26600, 50=1.97800, 100=1.73070, 500=1.31860, 1000=1.15378 (USD)", Radiation Hardening=No, REACH SVHC="No SVHC", RoHS=Yes, RoHS Compliant=Yes, Stock 1=1296, Supplier 1=Digi-Key, Termination=SMD/SMT, Voltage Rating=6.3V, Voltage Rating (DC)=6.3V, Width=4.3mm
C5 C6: library part CMP-1035-01048-1, "CAP 47pF 16V ±0.5pF 0603 (1608 Metric) Thickness 1mm SMD", Case-EIA=0603, Case-Metric=1608, Rated Voltage="16 V", Tolerance=Â±0.5pF, Max Thickness="1 mm", Technology=SMT
C8: library part GRJ155R60J106ME11D, "Capacitor Ceramic Mlcc 0402 10UF 6.3V SMD", Capacitance=10uF, Case Code (Imperial)=0402, Case Code (Metric)=1005, Manufacturer=Murata, Max Operating Temperature=85°C, Min Operating Temperature=-55°C, Tolerance=20%, Voltage Rating=6.3V, Case/Package=0402, Category="Ceramic Capacitors", ComponentLink1Description=http://psearch.en.murata.com/capacitor/product/GRJ155R60J106ME11%23.pdf?src-supplier=Digi-Key, ComponentLink1URL=http://psearch.en.murata.com/capacitor/product/GRJ155R60J106ME11%23.pdf?src-supplier=Digi-Key, Features="Soft Termination", Length=0.039inch, Manufacturer Part Number=GRJ155R60J106ME11D, Mount="Surface Mount", Packaging="Cut Tape", Pricing 1="10000=0.03490, 20000=0.03307 (USD)", RoHS=Yes, RoHS Compliant=Yes, Stock 1=1880133, Supplier 1=Digi-Key, Thickness=0.028inch, Width=0.02inch
C10 C11: library part CMP-1036-04927-1, "CAP 10uF 16V ±10% 0805 (2012 Metric) Thickness 1.45mm SMD", Case-EIA=0805, Case-Metric=2012, Rated Voltage="16 V", Tolerance=Â±10%, Max Thickness="1.45 mm", Technology=SMT
C12 C18 C24: library part CMP-1035-02736-1, "CAP 1uF 16V ±5% 0603 (1608 Metric) Thickness 1mm SMD", Case-EIA=0603, Case-Metric=1608, Rated Voltage="16 V", Tolerance=Â±5%, Max Thickness="1 mm", Technology=SMT
C13 C14: library part CMP-1035-00738-1, "CAP 18pF 16V ±5% 0603 (1608 Metric) Thickness 1mm SMD", Case-EIA=0603, Case-Metric=1608, Rated Voltage="16 V", Tolerance=Â±5%, Max Thickness="1 mm", Technology=SMT
C16 C17: library part CMP-03422-000048-1, "CAP CER 0.1UF 16V X7R 0402", Capacitance="100 nF", Manufacturer=YAGEO, Manufacturer Part Number=CC0402KRX7R7BB104, Package=CC0402, Temperature="-55°C to +125°C", Temperature Characteristic=X7R, Temperature Coefficient=30ppm/°C, Temperature Range High=+125°C, Temperature Range Low=-55°C, Tolerance=0.1, Voltage Rating="16 V", Automotive=No, Automotive Grade=NA, Category=Cap, ComponentLink2Description=Datasheet, ComponentLink2URL=http://www.yageo.com/documents/recent/UPY-GP_NP0_16V-to-50V_16.pdf, Device Class L1="Passive Components", Device Class L2=Capacitors, Device Class L3="Ceramic Capacitors", Digikey Description="CAP CER 0.1UF 16V X7R 0402", Footprint Url=http://www.yageo.com/exep/pages/download/literatures/UPY-C_GEN_24.pdf, Height=0.55mm, Ipc Land Pattern Name=CAPC10050X50, Lead Free=Yes, Material=Ceramic, Mouser Description="0402 0.1 uF 16 V ±10 % Tolerance X7R SMT Multilayer Ceramic Capacitor", Octopart=https://octopart.com/cc0402krx7r7bb104-yageo-42244624, RoHS=TRUE
Coutbck: library part CMP-2006-02797-2, "Chip Multilayer Ceramic Capacitors for General Purpose, 0603, 22uF, X5R, 15%, 20%, 6.3V GRM188R60J226MEA0D", Capacitance=22uF, Case Code (Imperial)=0603, Case Code (Metric)=1608, Dielectric=X5R, Max Operating Temperature=85°C, Min Operating Temperature=-55°C, Package Quantity=4000, Tolerance=20%, Voltage Rating=6.3V, Case/Package=0603, Depth=0.8mm, Height=0.8mm, Lead Free="Lead Free", Length=1.6mm, Mount="Surface Mount", Packaging="Tape and Reel", REACH SVHC="No SVHC", Termination=SMD/SMT, Thickness=0.039inch, Voltage Rating (DC)=6.3V, Weight=0.000222oz, Width=0.8mm
D1: library part CMP-2000-05285-1, "Ultra Low Capacitance Double Rail-to-Rail ESD Protection Diode, 5.5 V, 1 pF, -40 to 85 degC, 4-Pin SOT143B, RoHS, Tape and Reel", Capacitance Value=16pF, ESD Protection Voltage=8KV@ContactDisc, Leakage Current=0.1uA, Manufacturer="NXP Semiconductors", Operating Temperature Classification=Industrial, Operating Temperature Max Deg. C=85C, Operating Temperature Min Deg. C=-40C, Operating Temp Range=-40Cto85C, Package / Case=SOT, Reverse Breakdown Voltage=6V, Reverse Stand-off Voltage=5.5V, Configuration=Quad, Datasheet URL=https://datasheet.ciiva.com/4479/prtr5v0u2x-102853-4479461.pdf, Datasheet Version="Rev. 02, 01/2008", Direction Type=Uni-Directional, Leakage Current (Max)=0.1uA, Manufacturer URL=http://www.nxp.com/, Mounting=SurfaceMount, Mounting Style=SurfaceMount, Number of Elements=1, Package Type=SOT, Packaging=TapeandReel, Pin Count=3+Tab, Polarity=Uni-Directional, Product Depth (mm)=1.4mm, Product Height (mm)=1mm, Product Length (mm)=3mm, Rad Hardened=No, Suppressor Type=DiodeArrays, Working Voltage=5.5V, Working Voltage (Max)=5.5V
D3 D5 DS3: library part CMP-1674-00001-5, "LED Uni-Color Red, 100 mW, 200 mA, -55 to 85 degC, 2-Pin SMD, RoHS, Tape and Reel", Colour=Red, Manufacturer=Lite-On, Max Operating Temperature="85 degC", Min Operating Temperature="-55 degC", Package Quantity=3000, ComponentLink1Description="Manufacturer URL", ComponentLink1URL=http://www.us.liteon.com/, ComponentLink2Description=Datasheet, ComponentLink2URL=http://media.digikey.com/pdf/Data%20Sheets/Lite-On%20PDFs/LTST-C170CKT.pdf, DatasheetVersion=03/2003, Height="1.1 mm", Length="2 mm", Mount="Surface Mount", Mounting Technology="Surface Mount", PackageDescription="2-Pin Surface Mount Device, Body 2 x 1.25 mm", PackageReference=C170CKT, Packaging="Tape and Reel", Pins=2, RoHSCompliant=true
D4 DS1 DS2: library part CMP-1674-00002-5, "LED Uni-Color Green, 100 mW, 120 mA, -55 to 85 degC, 2-Pin SMD, RoHS, Tape and Reel", Colour=Green, Manufacturer=Lite-On, Max Operating Temperature="85 degC", Min Operating Temperature="-55 degC", Package Quantity=1, ComponentLink1Description="Manufacturer URL", ComponentLink1URL=http://www.us.liteon.com/, ComponentLink2Description=Datasheet, ComponentLink2URL=http://media.digikey.com/pdf/Data%20Sheets/Lite-On%20PDFs/LTST-C170GKT.pdf, DatasheetVersion=03/2003, Height="1.1 mm", Length="2 mm", Mount="Surface Mount", Mounting Technology="Surface Mount", PackageDescription="2-Pin Surface Mount Device, Body 2 x 1.25 mm", PackageReference=C170GKT, Packaging="Tape and Reel", Pins=2, RoHSCompliant=true
FB1: library part CMP-0686-00610-2, "Chip Ferrite Bead for Power Lines, 220 Ohm, 2000 mA, -55 to 125 degC, 2 x 1.25 x 1.05 mm SMD, Tape and Reel", DC Resistance="0.045 Ohm Max.", Manufacturer=Murata, Operating Temperature Range="-55 to 125 degC", Rated Current="2000 mA", ComponentLink1Description="Manufacturer URL", ComponentLink1URL=http://www.murata.com/, ComponentLink2Description=Datasheet, ComponentLink2URL=http://www.murata.com/products/catalog/pdf/c31e.pdf, ComponentLink3Description="Package Specification", ComponentLink3URL=http://www.murata.com/products/catalog/pdf/c31e.pdf, DatasheetVersion=08/2013, Impedance (at 100 MHz)="220 Ohm +/- 25%", Mounting Technology="Surface Mount", PackageDescription="2-Pin Chip, Body 2 x 1.25 mm", PackageReference=BLM21_H1050-2, Packing="Tape and Reel", PartNumber=BLM21PG221SN1D
FB2: library part CMP-08257-000002-1, "FERRITE BEAD 30 OHM 0603 1LN", Impedance At Frequency="30Ω @ 100MHz", Manufacturer=TDK, Manufacturer Part Number=MPZ1608S300ATAH0, Package=MPZ1608, Rms Current=5A, Series Resistance=0.01Ω, Temperature="-55°C to +125°C", Temperature Range High=+125°C, Temperature Range Low=-55°C, Tolerance=10%, Automotive=No, Category=FBead, ComponentLink2Description=Datasheet, ComponentLink2URL=https://product.tdk.com/info/en/catalog/datasheets/beads_commercial_power_mpz1608_en.pdf, Device Class L1="Passive Components", Device Class L2="EMI / RFI Components", Device Class L3="Ferrite Beads and Chips", Digikey Description="FERRITE BEAD 30 OHM 0603 1LN", Height=0.75mm, Ipc Land Pattern Name=CAPC16080X60, Lead Free=Yes, Mouser Description="Ferrite Beads 30ohms 5A 10mOhms 0603 Ferrite Chip", Octopart=https://octopart.com/mpz1608s300atah0-tdk-12062606, RoHS=TRUE
FD1 FD2 FD3: library part CMP-00174-A.4, "Fiducial 40x100mm"
J1: library part CMP-0031-00001-1, "Connector; USBMicro-B,Reverse type, SMT; 5 Position; Right Angle", Operating Temperature="-30 to 85 degC", ComponentLink1Description="Manufacturer URL", ComponentLink1URL=http://www.hirose.com/â€Ž, ComponentLink2Description=Datasheet, ComponentLink2URL=http://www.hirose.co.jp/cataloge_hp/e24200011.pdf, DatasheetVersion=08/2010, Mounting Technology="Surface Mount", PackageDescription="5-Pin USB Micro-B R/A Connector", PackageReference=ZX62R-B-5P, PartNumber=ZX62R-B-5P
J3 J4: "JST (JAPAN SOLDERLESS TERMINALS) - S4B-PH-SM4-TB(LF)(SN) - Wire-To-Board Connector, 2 mm, 4 Contacts, Header, PH Series, Surface Mount, 1 Rows", Color=Natural,White, Contact Resistance=20mR, Current Rating=2A, Flammability Rating="UL94 V-0", Housing Color=Beige, Insulation Color=Natural, Insulation Resistance=1GR, Manufacturer=JST, Max Operating Temperature=85°C, Max Voltage Rating (AC)=100V, Min Operating Temperature=-25°C, Supplier Part Number 1=38K8075, Category=Connectors, ComponentLink1Description=https://datasheet.ciiva.com/11746/0900766b80df0d9d-11746552.pdf?src-supplier=RSComponents, ComponentLink1URL=https://datasheet.ciiva.com/11746/0900766b80df0d9d-11746552.pdf?src-supplier=RSComponents, ComponentLink2Description=https://datasheet.ciiva.com/712/eph-712578.pdf?src-supplier=Digi-Key, ComponentLink2URL=https://datasheet.ciiva.com/712/eph-712578.pdf?src-supplier=Digi-Key, ComponentLink3Description=https://datasheet.ciiva.com/712/eph-712579.pdf?src-supplier=Digi-Key, ComponentLink3URL=https://datasheet.ciiva.com/712/eph-712579.pdf?src-supplier=Digi-Key, ComponentLink4Description=https://datasheet.ciiva.com/730/eph-730675.pdf?src-supplier=Digi-Key, ComponentLink4URL=https://datasheet.ciiva.com/730/eph-730675.pdf?src-supplier=Digi-Key, ComponentLink5Description=https://datasheet.ciiva.com/8052/1699381-8052234.pdf?src-supplier=Element14, ComponentLink5URL=https://datasheet.ciiva.com/8052/1699381-8052234.pdf?src-supplier=Element14, ComponentLink6Description=https://datasheet.ciiva.com/26894/getdatasheetpartid-639990-26894620.pdf?src-supplier=Verical, ComponentLink6URL=https://datasheet.ciiva.com/26894/getdatasheetpartid-639990-26894620.pdf?src-supplier=Verical, ComponentLink7Description=https://datasheet.ciiva.com/16376/eph-16376783.pdf?src-supplier=Future+Electronics, ComponentLink7URL=https://datasheet.ciiva.com/16376/eph-16376783.pdf?src-supplier=Future+Electronics, Connector Type="Header,Male Pin", Contact Material="Copper Alloy,Tin,Bronze,Brass", Contact Mating Length=0.13inch, Contact Plating=Tin,Copper, Contact Shape=Square, Depth=7.6mm, Fastening Type=Detent, Gender=Male, Height=9.4mm, Housing Material=Polyamide, Insulation Material=Nylon, Lead Free="Lead Free", Lead Pitch=2mm, Length=11.9mm, Manufacturer Part Number=S4B-PH-SM4-TB(LF)(SN), Max Current Rating=2A, Max Voltage Rating (DC)=100V, Mount="Surface Mount", Number of Contacts=4, Number of Poles=4, Number of Positions=4, Number of Rows=1, Orientation="Right Angle", Packaging="Tape and Reel", Pitch=2mm, REACH SVHC="No SVHC", RoHS=Yes, Supplier 1=Newark, Termination=Solder, Voltage Rating=100V, Voltage Rating (AC)=100V, Width=5mm, Working Voltage=100V
L1bck: library part CMP-0226-00067-1, "SMD Flat Wire High Current Inductor WE-HCI, L=1.00 µH 744311100", Inductance="1.00 ÂµH", ComponentLink1Description="Manufacturer Link", ComponentLink1URL=http://www.we-online.com, ComponentLink2Description=Datasheet, ComponentLink2URL=http://www.we-online.de/katalog/media/pdf/744311100.pdf, DatasheetVersion="ver 1, Feb-2008", PackageDescription="SMD Inductor, 2-Leads, Body 7.0 x 6.9 mm", PackageReference=WE-HCI-7040, PackageVersion=2008
L1bst: library part DR127-2R2-R, "Ind Power Shielded Wirewound 2.2uH 20% 100KHz Ferrite 12.5A T/R DR127-2R2-R", Case/Package=Nonstandard, Current Rating=12.5A, DC Resistance (DCR)=4.02mR, Inductance Tolerance=20%, Manufacturer="Eaton Cooper", Max DC Current=25.5A, Max Operating Temperature=125°C, Min Operating Temperature=-40°C, Package="Nonstandard Coiltronics", Package Quantity=350, Resistor Type=Wirewound, Self Resonant Frequency=100kHz, Supplier Part Number 1=513-1220-1-ND, Availability=Warning, Category="Fixed Inductors", ComponentLink1Description=https://datasheet.ciiva.com/14667/0900766b8116a153-14667792.pdf?src-supplier=RSComponents, ComponentLink1URL=https://datasheet.ciiva.com/14667/0900766b8116a153-14667792.pdf?src-supplier=RSComponents, ComponentLink2Description=https://datasheet.ciiva.com/26858/getdatasheetpartid-246998-26858414.pdf?src-supplier=Verical, ComponentLink2URL=https://datasheet.ciiva.com/26858/getdatasheetpartid-246998-26858414.pdf?src-supplier=Verical, ComponentLink3Description=https://datasheet.ciiva.com/30226/43bus-elx-ds-4315-dr-ser-30226599.pdf?src-supplier=Onlinecomponents.com, ComponentLink3URL=https://datasheet.ciiva.com/30226/43bus-elx-ds-4315-dr-ser-30226599.pdf?src-supplier=Onlinecomponents.com, ComponentLink4Description=https://datasheet.ciiva.com/8004/87246-8004873.pdf?src-supplier=Element14, ComponentLink4URL=https://datasheet.ciiva.com/8004/87246-8004873.pdf?src-supplier=Element14, ComponentLink5Description=https://datasheet.ciiva.com/16226/bus-elx-ds-4315-dr-series-16226311.pdf?src-supplier=Future+Electronics, ComponentLink5URL=https://datasheet.ciiva.com/16226/bus-elx-ds-4315-dr-series-16226311.pdf?src-supplier=Future+Electronics, ComponentLink6Description=https://datasheet.ciiva.com/16940/70037876-16940757.pdf?src-supplier=Allied+Electronics, ComponentLink6URL=https://datasheet.ciiva.com/16940/70037876-16940757.pdf?src-supplier=Allied+Electronics, Core Material=Ferrite, DC Current=12.5A, Depth=12.5mm, DigiKey-Purchase-URL=https://snapeda.com/shop?store=DigiKey&id=498534, Height=8mm, Height - Seated (Max)=0.315inch, Inductance=2.2uH, Lead Free="Lead Free", Length=12.5mm, Manufacturer Part Number=DR127-2R2-R, MF=Eaton, Military Standard=Not, Mount="Surface Mount", Mouser-Purchase-URL=https://snapeda.com/shop?store=Mouser&id=498534, MP=DR127-2R2-R, Packaging="Tape and Reel", Price=None, Pricing 1="1=1.50000, 10=1.39400, 25=1.28720, 50=1.07240, 100=1.00820 (USD)", Radiation Hardening=No, Rated Current-Max=12.5A, REACH SVHC="No SVHC", RMS Current (Irms)=12.5A, RoHS=Yes, Saturation Current=25.5A, Series=DR, Shielding=Shielded, SnapEDA_Link=https://www.snapeda.com/parts/DR127-2R2-R/Eaton/view-part/498534/?ref=snap, Stock 1=200, Supplier 1=Digi-Key, Termination=SMD/SMT, Test Frequency=100kHz, Tolerance=20%, Weight=0.208oz, Width=0.492inch
LS: "TDK - PS1240P02BT - BUZZER, PIEZO, 70DB, 12.2MM", Frequency=4kHz, Manufacturer=TDK, Max Operating Temperature=70°C, Min Operating Temperature=-10°C, Operating Supply Voltage=3V, Package="2020 TDK", Package Quantity=1, Supplier Part Number 1=445-2525-1-ND, Availability=Unavailable, Category="Audio Products", ComponentLink1Description=https://datasheet.ciiva.com/0/ef532-ps-112.pdf?src-supplier=Digi-Key, ComponentLink1URL=https://datasheet.ciiva.com/0/ef532-ps-112.pdf?src-supplier=Digi-Key, ComponentLink2Description=https://datasheet.ciiva.com/0/ef532-ps-111.pdf?src-supplier=Digi-Key, ComponentLink2URL=https://datasheet.ciiva.com/0/ef532-ps-111.pdf?src-supplier=Digi-Key, ComponentLink3Description=https://datasheet.ciiva.com/3306/ef532-ps-3306958.pdf?src-supplier=Avnet, ComponentLink3URL=https://datasheet.ciiva.com/3306/ef532-ps-3306958.pdf?src-supplier=Avnet, ComponentLink4Description=https://datasheet.ciiva.com/16225/ef532-ps-16225062.pdf?src-supplier=Onlinecomponents.com, ComponentLink4URL=https://datasheet.ciiva.com/16225/ef532-ps-16225062.pdf?src-supplier=Onlinecomponents.com, Diameter=12.2mm, Height=6.5mm, Lead Free="Lead Free", Manufacturer Part Number=PS1240P02BT, MF=TDK, Mount="Through Hole", MP=PS1240P02BT, Number of Pins=2, Number of Terminals/Pins=2, Packaging="Tape and Reel", Price=None, Pricing 1="1=0.61000, 10=0.52500, 25=0.49120, 50=0.46580, 100=0.44110 (USD)", RoHS=Yes, RoHS Compliant=Yes, Series=PS, SnapEDA_Link=https://www.snapeda.com/parts/PS1240P02BT/TDK/view-part/53420/?ref=snap, Stock 1=31933, Supplier 1=Digi-Key, Termination="PC Pins", Voltage Rating (DC)=3V, Washable=No
P1: library part CMP-2000-05418-1, "Male Header, Pitch 2.54 mm, 1 x 3 Position, Height 10.03 mm, Tail Length 3.56 mm, -55 to 105 degC", Color=White, Current, Rating="5 /  / A", Flammability Rating=UL94V-0, Manufacturer="TE Connectivity", Temperature, Operating="-55to+105 /  / degC", Voltage, Rating="250 /  / V", Agency Approvals=CSA,UL, Angle=Straight, Brand/Series=MTA-100Series, Color, Housing=White, Connector Type=MTA-100, Contact Centerline Spacing="0.100 /  / in.", Contact Mating Area Plating=Tin, Contact Plating=Tin, Contact Shape=Square, Contact Termination Area Plating=Tin, Datasheet URL=https://datasheet.ciiva.com/16456/eng-ds-82056-mta-0608-16456886.pdf, Datasheet Version=Jun-08, Length, Overall="0.3 /  / \"", Length, Pin="0.14 /  / \"", Length, Terminal Post="0.14 /  / in.", Manufacturer URL=http://www.te.com/, Material, Contact=CopperAlloy, Material, Housing=Polyester, Mount Angle=Vertical, Mounting Hole Size="0.04 /  / \"", Mounting Type=PCMount, Number of Contacts=3, Number of Positions=3, Number of Rows=1, Pin Spacing="0.1 /  / \"", Primary Type=InterconnectSystem, Size, Post="0.025 /  / in.", Special Features=Pinstrip, Standards=RoHSCompliant,ELVCompliant,UL94V-0, Termination=Solder, Type=PCBPlug
Q: library part 2SC1815, "Transistor GP BJT NPN 50V 150mA 3-Pin TO-92 Box 2SC1815", Manufacturer="Central Semiconductor", Manufacturer Part Number="2SC1815 PBFREE", Package="- Central Semiconductor", Supplier Part Number 1=1514-2SC1815PBFREE-ND, Availability=Unavailable, MF="Central Semiconductor", MP=2SC1815, Price=None, Pricing 1="1=0.98000, 10=0.87700, 100=0.68340, 500=0.56458, 1000=0.44572, 2000=0.42050 (USD)", RoHS=Yes, RoHS Compliant=Yes, SnapEDA_Link=https://www.snapeda.com/parts/2SC1815/Central%20Semiconductor/view-part/4614189/?ref=snap, Stock 1=8551, Supplier 1=Digi-Key